# Altium PCB NodoFinalTBeam.PcbDoc
Units mil, origin at the board's own origin, x right, y up, seen from the top; angles counter-clockwise.
Board outline 3921.25 x 1310 mil, 2 copper layers (Top Layer, Bottom Layer); 9 components, 12 nets, 61 pads, 1 vias.
Unrouted connection lines stored in the file: 2.
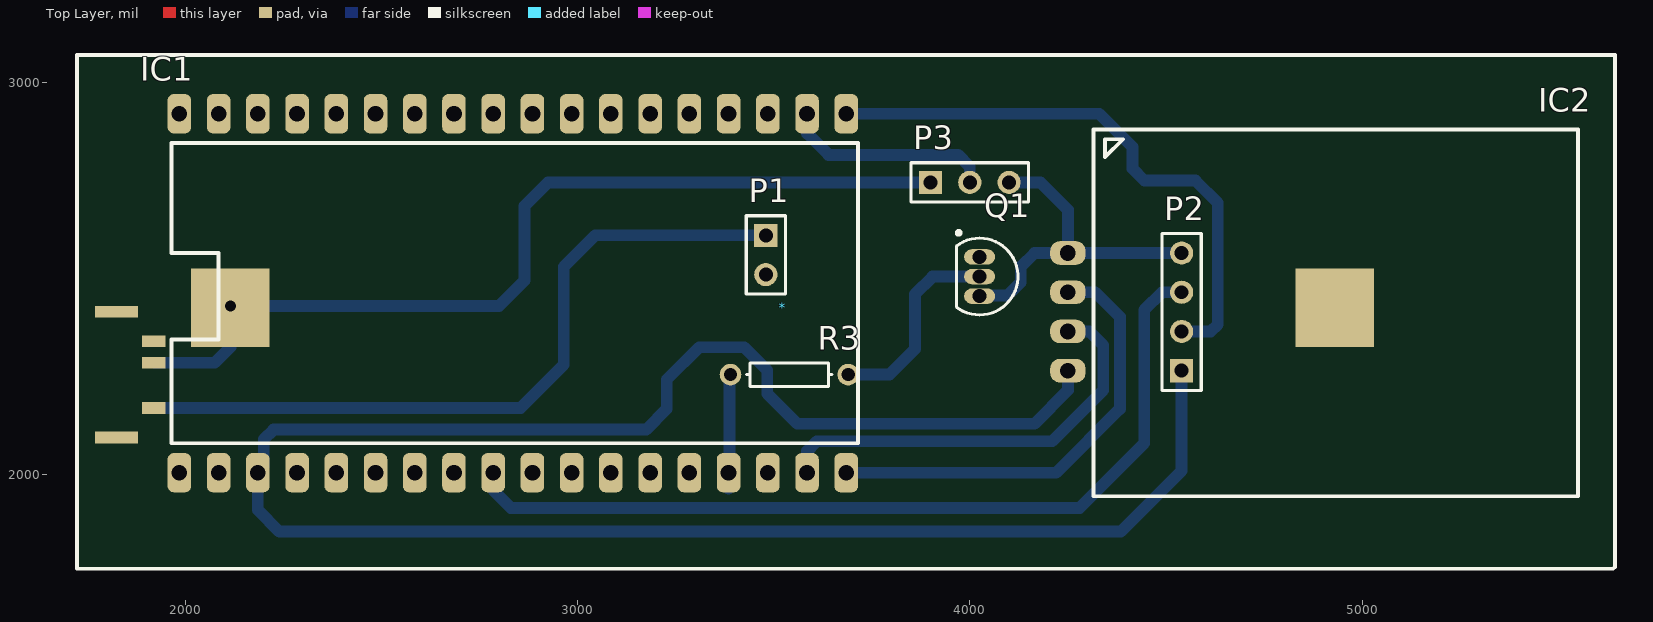
[diagram p0: Top Layer view]
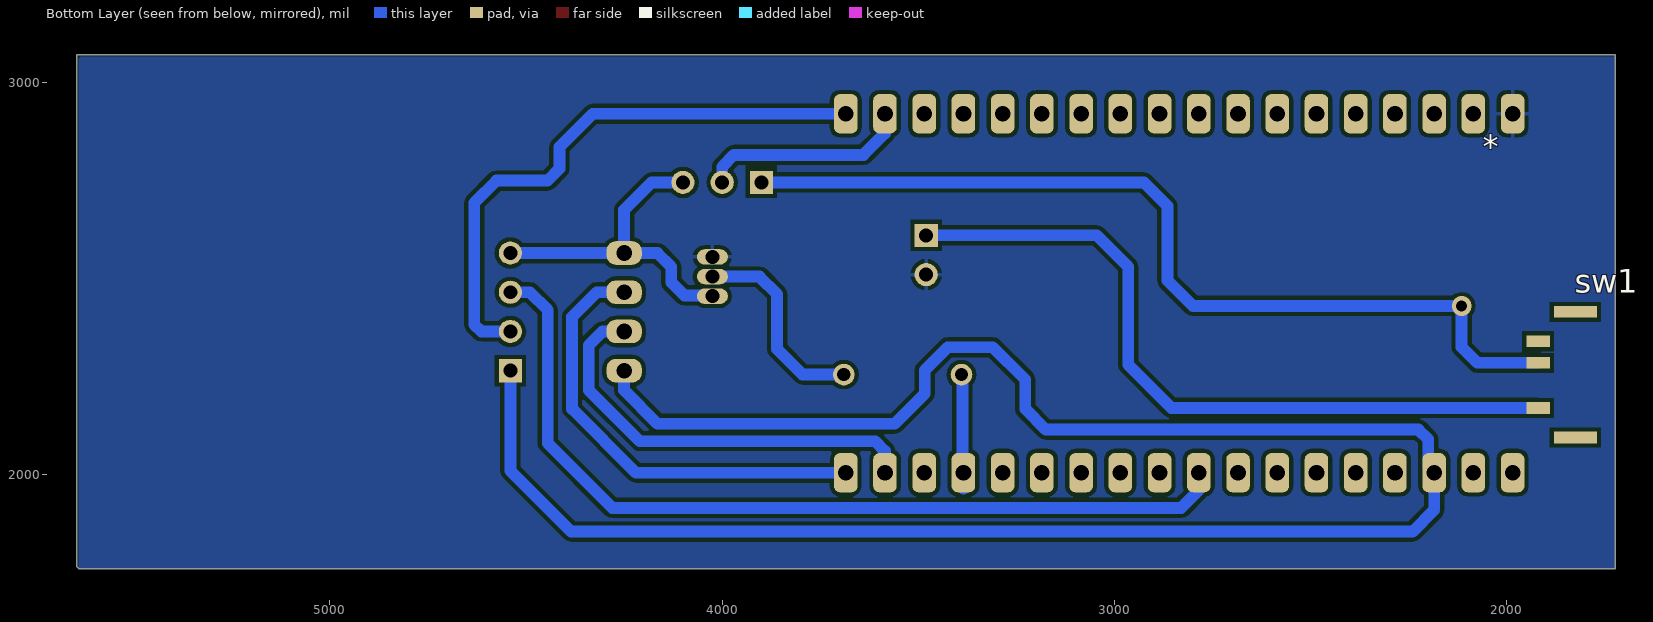
[diagram p1: Bottom Layer view, seen from below]

## Layer stack, top to bottom
Top Solder: solder mask 0.4, Solder Resist, Dk 3.5
Top Layer: signal copper 1.4
Dielectric 1: dielectric 12.6, FR-4, Dk 4.8
Bottom Layer: signal copper 1.4
Bottom Solder: solder mask 0.4, Solder Resist, Dk 3.5

## Board outline
1723.75,1760 5640,1760 5645,1765 5645,3070 1723.75,3070

## Design rules (kind name [scope] priority, off if disabled: settings)
Clearance [All] p1: gap=10 ignorepadtopadclearanceinfootprint=FALSE except(0: Arc-Hole Track-Hole SMDPad-Hole THPad-Hole Via-Hole Fill-Hole Poly-Hole Region-Hole Text-Hole)
PolygonConnect [All] p1: connectstyle=Relief reliefconductorwidth=10 reliefentries=4 polygonreliefangle="90 Angle" airgapwidth=10
RoutingVias [All] p1: holewidth=28 width=50 viastyle="Through Hole" minholewidth=28 minwidth=50 maxholewidth=28 maxwidth=50
SolderMaskExpansion [All] p1: expansion=4
Width [All] p1: maxlimit=30 minlimit=30 preferedwidth=30
30 further rules are at their usual default settings.

## Components (designator, comment, footprint, x,y, rotation, side; value= is the part's Value field where it differs from the comment)
* "Li18650" Li18650 2235,2435 r90 bottom
IC1 "HELTECV1" HELTECV1 1985,2920 r270 top
IC2 "NEO6M" NEO6M 4250,2565 r270 top
P1 "Header 2" HDR1X2 3480,2610 r270 top
P2 "Header 4" HDR1X4 4540,2265 r90 top
P3 "Header 3" HDR1X3 3900,2745 r0 top
Q1 "2N3904" TO-92A 4025,2505 r180 top
R3 "Res1" AXIAL-0.3 3540,2255 r180 top value=1K
sw1 "Sw" InterruptorSMD 1920,2340 r270 bottom

## Footprints (in the part's own frame and the unit in brackets; to place one, negate y for a bottom-side part, rotate by r counter-clockwise, add the part's x,y. Pads: shape width x height; smd on the part's side, far side on the other; paste and mask are expansions set on the pad)
AXIAL-0.3 [mm] "Axial Device, Thru-Hole; 2 Leads; 0.3 in Pin Spacing"
  round 1.4 hole 0.85: 1(-3.81,0) 2(3.81,0)
  silkscreen extent -2.77,-0.76 2.77,0.76
HDR1X2 [mm] "Connector; Header; 2 Position"
  rect 1.5x1.5 hole 0.9: 1(0,0)
  round 1.5 hole 0.9: 2(2.54,0)
  silkscreen extent -1.27,-1.27 3.81,1.27
HDR1X3 [mm] "Connector; Header; 3 Position"
  rect 1.5x1.5 hole 0.9: 1(0,0)
  round 1.5 hole 0.9: 2(2.54,0) 3(5.08,0)
  silkscreen extent -1.27,-1.27 6.35,1.27
HDR1X4 [mm] "Connector; Header; 4 Position"
  rect 1.5x1.5 hole 0.9: 1(0,0)
  round 1.5 hole 0.9: 2(2.54,0) 3(5.08,0) 4(7.62,0)
  silkscreen extent -1.27,-1.27 8.89,1.27
HELTECV1 [mil] "ESP32 BASED MCU"
  rrect50% 100x60 hole 40: 1(0,0) 2(0,100) 3(0,200) 4(0,300) 5(0,400) 6(0,500) 7(0,600) 8(0,700) 9(0,800) 10(0,900) 11(0,1000) 12(0,1100) 13(0,1200) 14(0,1300) 15(0,1400) 16(0,1500) 17(0,1600) 18(0,1700) 19(915,1700) 20(915,1600) 21(915,1500) 22(915,1400) 23(915,1300) 24(915,1200) 25(915,1100) 26(915,1000) 27(915,900) 28(915,800) 29(915,700) 30(915,600) 31(915,500) 32(915,400) 33(915,300) 34(915,200) 35(915,100) 36(915,0)
  silkscreen extent 75,-20 840,1730, body extent -33,-110 963,1927, height 558
InterruptorSMD [mil]
  rect 30x60 all layers, no hole: 1(0,0) 2(55,0) 3(170,0)
  rect 30x110 all layers, no hole: 4(-75,95) 4(245,95)
  body extent -72,0 242,244, height 56
Li18650 [mil]
  rect 200x200 smd far side: 1(-10,-120) 2(-10,2695)
  body extent -372,-95 352,2669, height 762
NEO6M [mil]
  rrect80% 60x90 hole 40: 1(0,0) 2(100,0) 3(200,0) 4(300,0)
  silkscreen extent -315,65 620,1300, body extent -330,-79 635,1359, height 269
TO-92A [mm] "TO, Flat Index; 3 In-Line, Axial Leads; Body Dia. 4.5mm; Leads 0.51 x 0.48 mm (max)"
  oval 2x1 hole 0.9: 1(0,-1.27) 2(0,0) 3(0,1.27)
  silkscreen extent -2.48,-2.95 1.5,2.48, body extent -2.48,-2.5 1.5,2.5, height 6.86

## Part data
IC1: "ESP32 LORA BASED MCU"
IC2: "GPS NEO6M"
P1: "Header, 2-Pin", LatestRevisionDate=17-Jul-2002, LatestRevisionNote="Re-released for DXP Platform.", Publisher="Altium Limited"
P2: "Header, 4-Pin", LatestRevisionDate=17-Jul-2002, LatestRevisionNote="Re-released for DXP Platform.", Publisher="Altium Limited"
P3: "Header, 3-Pin", LatestRevisionDate=17-Jul-2002, LatestRevisionNote="Re-released for DXP Platform.", Publisher="Altium Limited"
Q1: "NPN General Purpose Amplifier", ComponentLink1Description="Manufacturer Link", ComponentLink1URL=http://www.fairchildsemi.com/, ComponentLink2Description=Datasheet, ComponentLink2URL=http://www.fairchildsemi.com/ds/2N%2F2N3904.pdf, DatasheetVersion=1997, LatestRevisionDate=15-Jan-2003, LatestRevisionNote="PCB Footprint 'BCY-W3/D4.7' replaced", PackageDescription="TO, Flat Index; 3 In-Line, Axial Leads; Body Dia. 4.5mm; Leads 0.51 x 0.48 mm (max)", PackageReference=TO-92A, PackageVersion=Sep-1998, Published=8-Jun-2000, Publisher="Altium Limited"
R3: "Resistor", LatestRevisionDate=17-Jul-2002, LatestRevisionNote="Re-released for DXP Platform.", PackageDescription="Axial Device, Thru-Hole; 2 Leads; 0.3 in Pin Spacing", PackageReference=AXIAL-0.3, Published=8-Jun-2000, Publisher="Altium Limited"

## Via types
v1: diameter 50, hole 28, Top Layer to Bottom Layer, 1 vias

## Nets (pads, with @x,y where several pads share a name; then routed paths per layer and width w, separated by ;. In a path a pad name is that pad's centre, name@x,y a point inside that pad or via, vN(x,y) a via of type N, cw(c..) or ccw(c..) an arc to the next point about the centre after c; other vN are vias at no path point)
3V3: IC1.3 IC1.34 IC2.4 P2.1 | length 5275.6
  Bottom Layer w30: IC2.4 4250,2215 4165,2130 3560,2130 3483.75,2206.25 3483.75,2266.25 3425,2325 3310,2325 3227.5,2242.5 3227.5,2167.5 3175,2115 2225,2115 2200,2090 2200,2020 IC1.34 2185,1910 2240,1855 4385,1855 4540,2010 P2.1
GND: *.2 IC1.1 P1.2 Q1.1
GND_GPS: IC2.1 P2.4 P3.3 Q1.3 | length 883
  Bottom Layer w30: Q1.3 4026.79,2456.79 4096.79,2456.79 4130,2490 4130,2530 4165,2565 IC2.1 ; P3.3@4090,2745 P3.3 4180,2745 4250,2675 IC2.1 ; P2.4 IC2.1
NetP1_1: P1.1 sw1.3 | length 1888.7
  Bottom Layer w30: sw1.3 2855,2170 2965,2280 2965,2530 3045,2610 P1.1
NetQ1_2: Q1.2 R3.1 | length 524.7
  Bottom Layer w30: R3.1@3690,2245 3700,2255 3795,2255 3860,2320 3860,2460 3905,2505 Q1.2
RX: IC1.19 IC2.2 | length 1158.3
  Bottom Layer w30: IC1.19 4220,2005 4382.57,2167.57 4382.57,2402.43 4320,2465 IC2.2
SB: IC1.17 P3.2 | length 540.2
  Bottom Layer w30: IC1.17 3585,2870 3640,2815 3970,2815 4000,2785 P3.2
SCL: IC1.28 P2.3 | length 2245.6
  Bottom Layer w30: IC1.28 2785,1960 2830,1915 4280,1915 4445,2080 4445,2420 4490,2465 P2.3
SDA: IC1.18 P2.2 | length 1483.1
  Bottom Layer w30: IC1.18 4330,2920 4415,2835 4415,2780 4445.33,2749.67 4575.33,2749.67 4632.1,2692.9 4632.1,2382.57 4614.53,2365 P2.2
TX: IC1.20 IC2.3 | length 1093.7
  Bottom Layer w30: IC1.20 3585,2060 3610,2085 4210,2085 4340,2215 4340,2330 4305,2365 IC2.3
VBAT: *.1 P3.1 sw1.2 | length 2343.3
  Bottom Layer w30: sw1.2 2075,2285 2115,2325 v1(2115,2430) 2800,2430 2865,2495 2865,2685 2925,2745 P3.1
VextGPIO: IC1.22 R3.2 | length 291
  Bottom Layer w30: IC1.22@3385,1965 3387.5,1967.5 R3.2@3387.5,2255
pads on no net: IC1.2 IC1.4 IC1.5 IC1.6 IC1.7 IC1.8 IC1.9 IC1.10 IC1.11 IC1.12 IC1.13 IC1.14 IC1.15 IC1.16 IC1.21 IC1.23 IC1.24 IC1.25 IC1.26 IC1.27 IC1.29 IC1.30 IC1.31 IC1.32 IC1.33 IC1.35 IC1.36 sw1.1 sw1.4

## Polygon pours and split planes (outlines as drawn)
GND on Bottom Layer (solid, pour order 0): 1725,1760 5640,1760 5640,3060 5635,3065 1725,3065

## Silkscreen, mask and mechanical layers (free items; w line width, h text height)
Top Overlay:
  the board outline again, w10